# EAGLE board fonte3 (EAGLE 9.6.2)
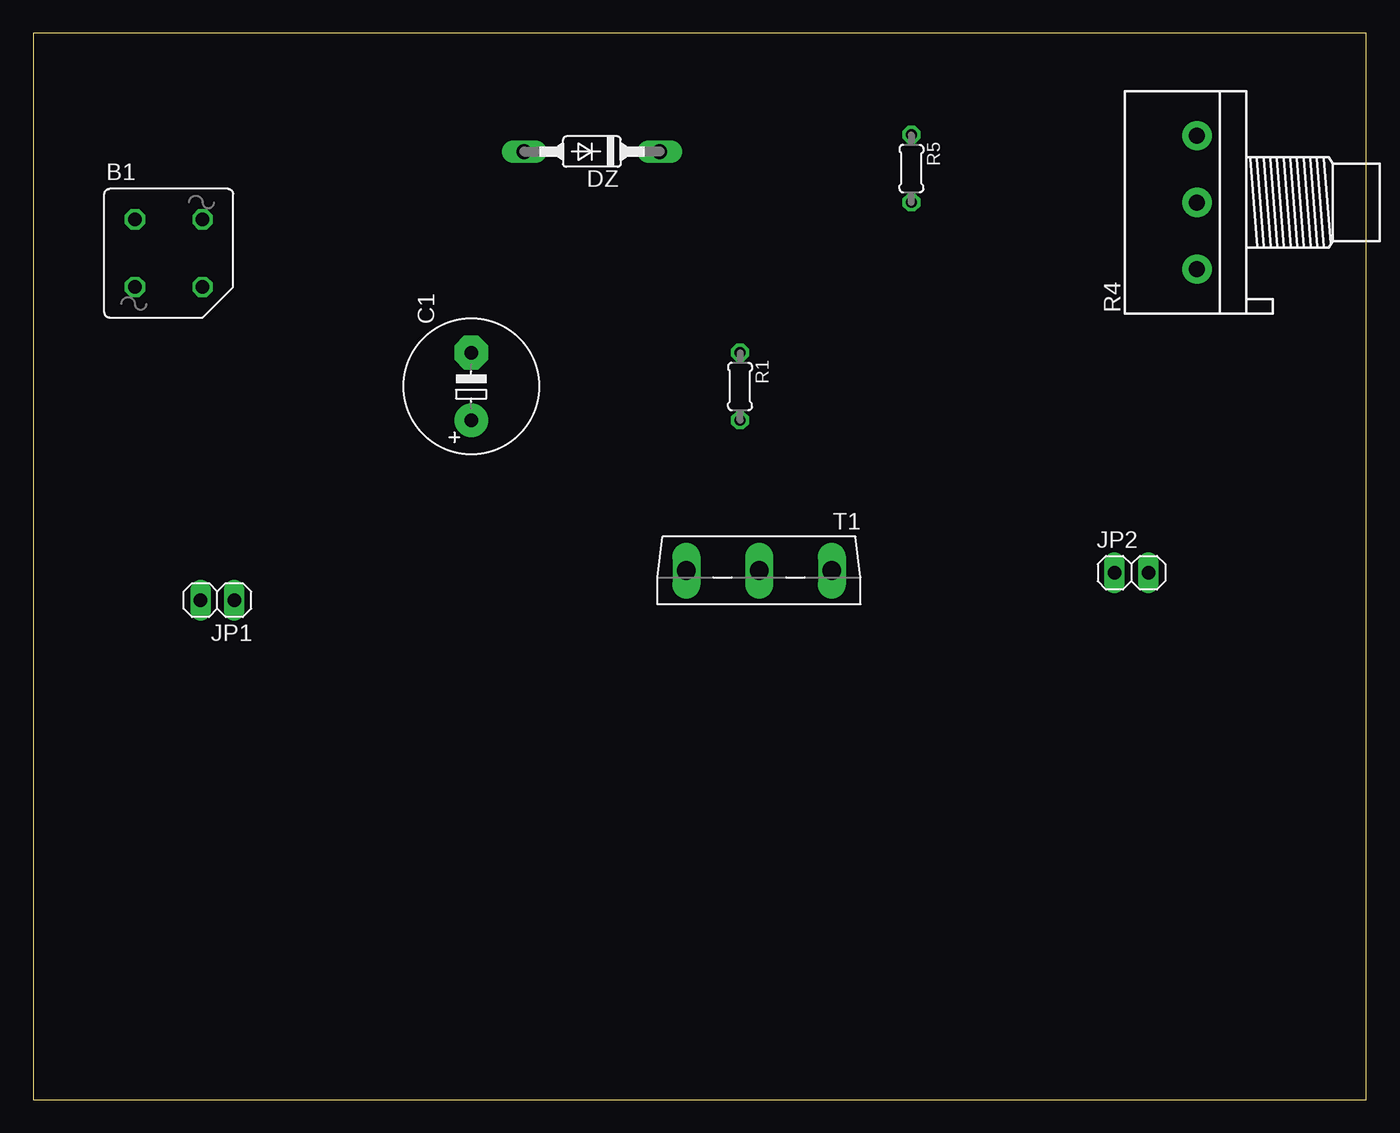
[diagram p0: board, top side]
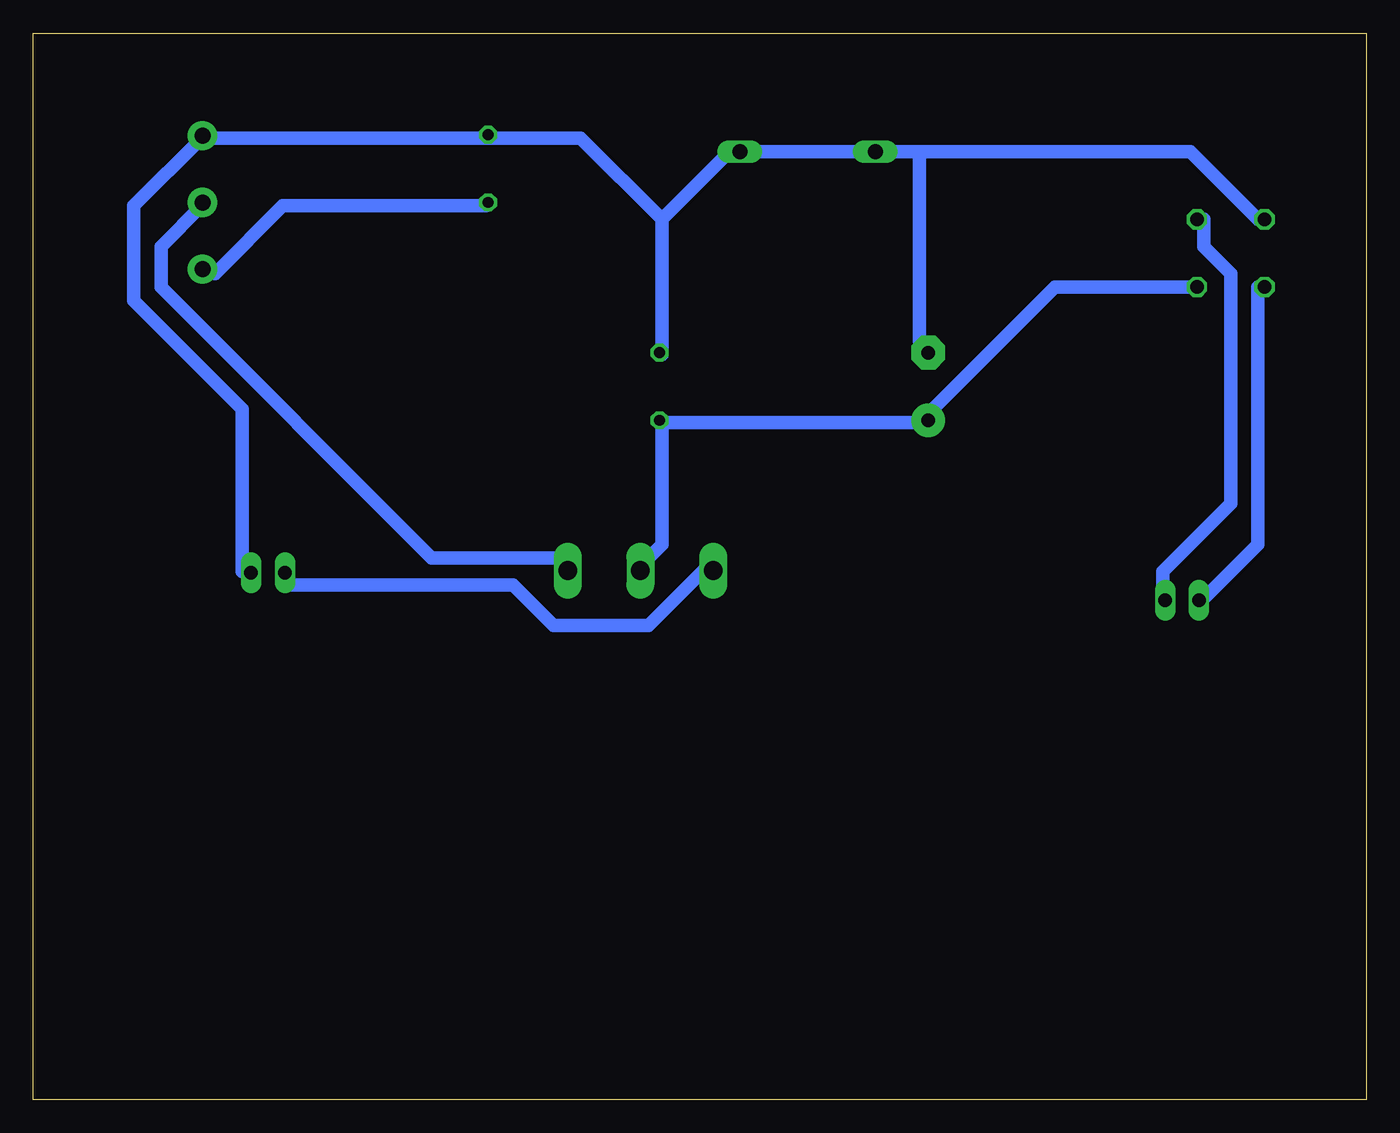
[diagram p1: board, bottom side, seen from below]

Size 100 x 80 mm. Coordinates in mm from the lower left corner, seen from the top.
Outline: 0,0 100,0 100,80 0,80 0,0
Copper layers (1*16): Top 0.035mm / dielectric 1.5mm / Bottom 0.035mm
Design rules "default *": minimum track width 40mil, minimum drill 0.35mm, track to track 40mil, track to pad 40mil, pad to pad 40mil, via to via 40mil, smd to smd 6mil, copper to edge 40mil, drill to drill 6mil, minimum pad ring 10mil, minimum via ring 8mil, stop-mask expansion 4mil, vias tented up to drill 0mil, thermal gap 10mil

## Footprints (pad centres in the part's own frame; a part is rotated, then mirrored left to right if it is on the bottom)
1KAB = drill 1.016 octagon: + 2.54,-2.54; - -2.54,2.54; AC1 -2.54,-2.54; AC2 2.54,2.54
E5-10,5 = drill 1.016 pad 2.54: + -2.54,0 | drill 1.016 pad 2.54 octagon: - 2.54,0
SOD81 = drill 1.118 long: A 5.08,0; C -5.08,0
1X02 = drill 1.016 long: 1 -1.27,0; 2 1.27,0
0204/5 = drill 0.813 octagon: 1 -2.54,0; 2 2.54,0
3RP/1610N = drill 1.2 pad 2.184: 1 -5,0; 2 0,0; 3 5,0
SOT93V = drill 1.397 long: B -5.461,-2.54; C 0,-2.54; E 5.461,-2.54

## Placement (x,y rotation side)
B1  [1KAB]  10.16,63.5 0 top
C1  470µF  [E5-10,5]  32.86,53.5 90 top
DZ  13V  [SOD81]  41.91,71.12 180 top
JP1  [1X02]  13.81,37.47 180 top
JP2  [1X02]  82.39,39.53 0 top
R1  470Ω  [0204/5]  53.02,53.5 270 top
R4  [3RP/1610N]  87.31,67.31 90 top
R5  390Ω  [0204/5]  65.88,69.85 270 top
T1  [SOT93V]  54.45,37.15 180 top

## Library data of the parts
B1 = rectifier
C1 = resistor
DZ = diode
JP1 JP2 = pinhead
R1 R5 = rcl; SPICEPREFIX: R
R4 = pot
T1 = transistor

## Nets
N$1: B1.AC1 JP1.2
N$2: B1.AC2 JP1.1
N$3: B1.+ C1.+ R1.2 T1.C
N$4: R4.1 R5.2
N$5: R4.2 T1.B
N$6: JP2.1 T1.E
N$10: B1.- C1.- DZ.A DZ.C JP2.2 R1.1 R4.3 R5.1

## Tracks (layer width: path | path; a pad name or v marks a point on that pad's centre or on a via)
N$1
  Bottom 1.016: B1.AC1 8.13,60.96 8.13,41.66 12.19,37.59 JP1.2
N$2
  Bottom 1.016: B1.AC2 12.19,66.04 12.19,64.01 10.16,61.98 10.16,44.7 15.24,39.62 15.24,37.59 JP1.1
N$3
  Bottom 1.016: 52.83,50.8 52.83,41.66 53.85,40.64 T1.C | B1.+ 23.37,60.96 32.51,51.82 C1.+ 33.53,50.8 52.83,50.8 | 52.83,50.8 R1.2
N$4
  Bottom 1.016: R5.2 66.04,67.06 81.28,67.06 86.36,61.98 R4.1
N$5
  Bottom 1.016: T1.B 59.94,40.64 70.1,40.64 90.42,60.96 90.42,64.01 87.38,67.06 R4.2
N$6
  Bottom 1.016: JP2.1 81.28,38.61 64.01,38.61 60.96,35.56 53.85,35.56 49.78,39.62 T1.E
N$10
  Bottom 1.016: JP2.2 84.33,39.62 84.33,51.82 92.46,59.94 92.46,67.06 87.38,72.14 R4.3 86.36,72.14 66.04,72.14 | 52.83,66.04 52.83,55.88 R1.1 | 52.83,66.04 47.75,71.12 DZ.C DZ.A 33.53,71.12 | 66.04,72.14 58.93,72.14 52.83,66.04 | 33.53,71.12 13.21,71.12 8.13,66.04 B1.- | 33.53,71.12 33.53,56.9 C1.- | 66.04,72.14 R5.1